# Altium PCB PCB1.PcbDoc
Units mil, origin at the board's own origin, x right, y up, seen from the top; angles counter-clockwise.
Board outline 1058 x 497 mil, 2 copper layers (Top Layer, Bottom Layer); 7 components, 6 nets, 16 pads, 0 vias.
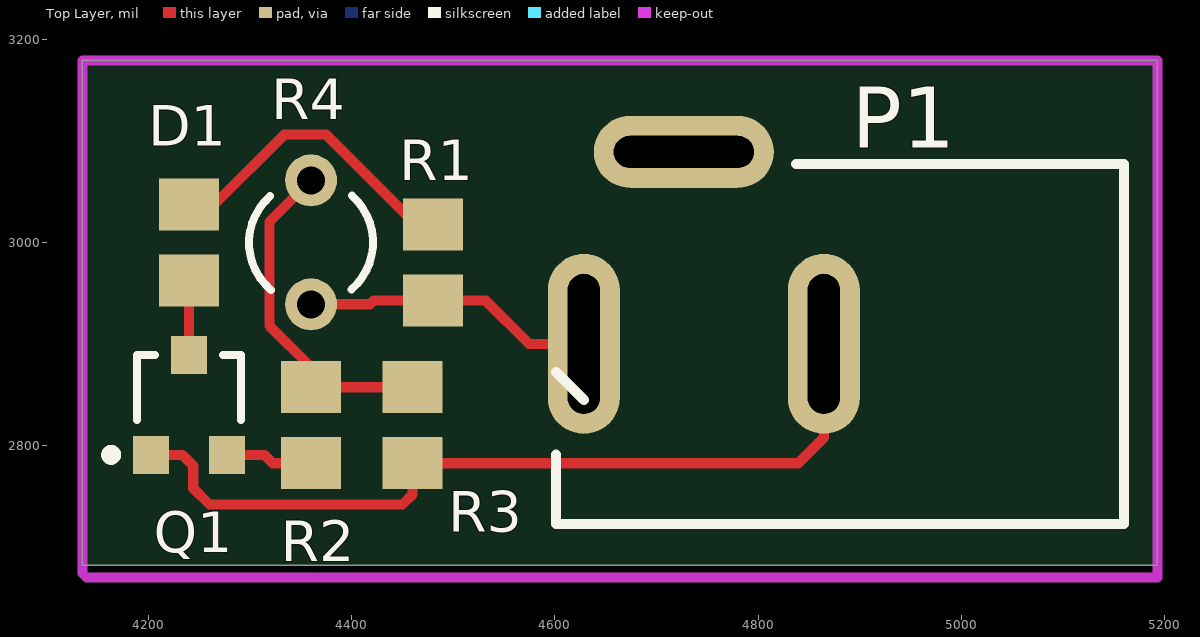
[diagram p0: Top Layer view]
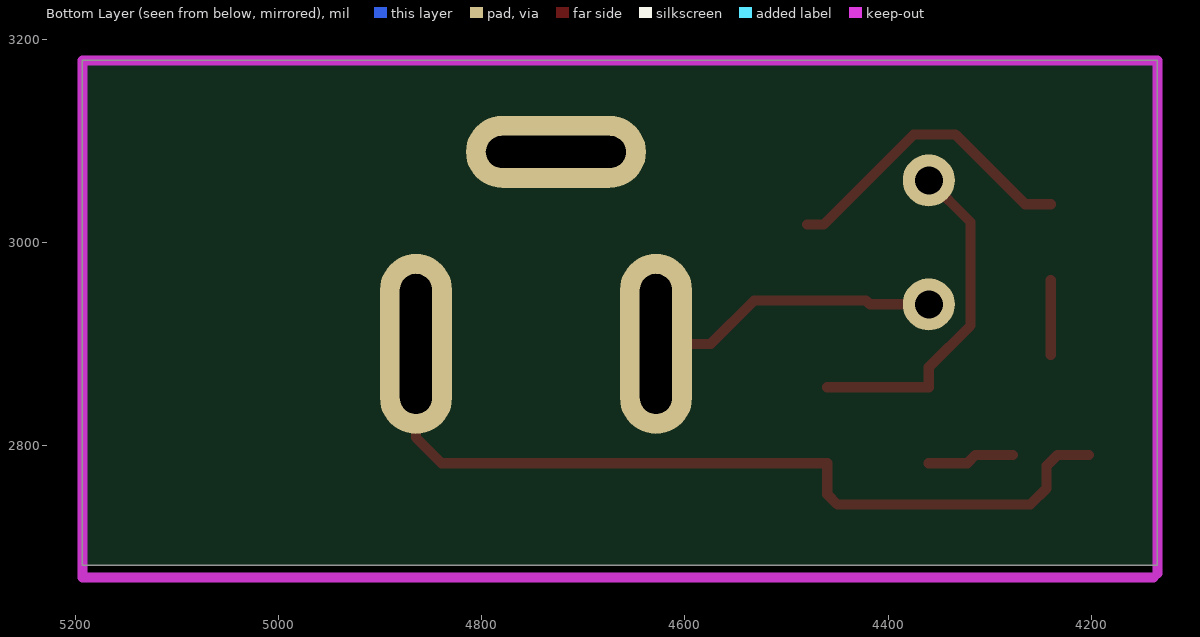
[diagram p1: Bottom Layer view, seen from below]

## Layer stack, top to bottom
Top Layer: signal copper 1.4
Dielectric: dielectric 12.6, FR-4, Dk 4.8
Bottom Layer: signal copper 1.4

## Board outline
4135,3179 5193,3179 5193,2682 4135,2682

## Design rules (kind name [scope] priority, off if disabled: settings)
Clearance [All] p1: gap=10
PolygonConnect [All] p1: connectstyle=Relief reliefconductorwidth=10 reliefentries=4 polygonreliefangle="90 Angle"
RoomDefinition Sheet1 [InComponentClass('Sheet1')] p1: confinementstyle=ConfineIn formatcopy=TRUE lockcomponents=FALSE outline 0,0 2000,0 2000,1000 0,1000
RoutingVias [All] p1: holewidth=28 width=50 viastyle="Through Hole" minholewidth=28 minwidth=50 maxholewidth=28 maxwidth=50
SilkscreenOverComponentPads [All] p1: minsilkscreentomaskgap=10
SolderMaskExpansion [All] p1: expansion=4
TestPointUsage [All] p1: valid=0 allowmultiple=FALSE
Testpoint [All] p1: side=15 testpointundercomponent=TRUE minsize=40 maxsize=100 preferedsize=60 minholesize=0 maxholesize=40 preferedholesize=32 testpointgrid=1 style=1023 order=0-112345678
Width [All] p1: maxlimit=10 minlimit=10 preferedwidth=10
23 further rules are at their usual default settings.

## Components (designator, comment, footprint, x,y, rotation, side; value= is the part's Value field where it differs from the comment)
D1 "LED" 2012[0805] 4240,3000 r270 top
P1 "Header 3" PCBComponent_1 5160,2900 r180 top
Q1 "8550" SOT-23B 4240,2840 r0 top
R1 "Res2" 2012[0805] 4480,2980 r270 top
R2 "Res2" 2012[0805] 4360,2820 r270 top
R3 "Res2" 2012[0805] 4460,2820 r90 top
R4 "5547" R38 4360,3000 r0 top (schematic designator 光敏电阻)

## Footprints (in the part's own frame and the unit in brackets; to place one, negate y for a bottom-side part, rotate by r counter-clockwise, add the part's x,y. Pads: shape width x height; smd on the part's side, far side on the other; paste and mask are expansions set on the pad)
2012[0805] [mm] "Chip Resistor; Body 2.0 x 1.3 mm (LxW typ)"
  rect 1.3x1.5 smd: 1(-0.95,0) 2(0.95,0)
PCBComponent_1 [mm]
  oval 1.8x4.5 hole 0.8 slot 3.5 at 90 deg: 1(13.5,0) 3(7.5,0)
  oval 4.5x1.8 hole 0.8 slot 3.5 at 0 deg: 2(11,-4.8)
  silkscreen extent 0,-4.5 14.2,4.5
R38 [mm] "Crystal, Thru-Hole; 2 Leads; Body 3.1 x 8.2 mm (Dia.xH)"
  round 1.3 hole 0.7: 1(0,1.55) 2(0,-1.55)
  silkscreen extent -1.55,-1.19 1.55,1.17
SOT-23B [mm] "SOT-23; 3 Leads; Body 3.0 x 2.6 mm, inc. leads (LxW max)"
  rect 0.9x0.95 smd: 1(-0.95,-1.25) 2(0.95,-1.25) 3(0,1.25)
  silkscreen extent -2.07,-1.37 1.3,1.25

## Part data
D1: library part LED0, "Typical INFRARED GaAs LED"
P1: "Header, 3-Pin"
Q1: library part PNP, "PNP Bipolar Transistor"
R1 R2 R3: "Resistor"
R4: library part Res2, "Resistor"

## Nets (pads, with @x,y where several pads share a name; then routed paths per layer and width w, separated by ;. In a path a pad name is that pad's centre, name@x,y a point inside that pad or via, vN(x,y) a via of type N, cw(c..) or ccw(c..) an arc to the next point about the centre after c; other vN are vias at no path point)
NetD1_1: D1.1 R1.1 | length 305.1
  Top Layer w10: D1.1 4265,3037.4 4333.6,3106 4375,3106 4463.6,3017.4 R1.1
NetD1_2: D1.2 Q1.3 | length 73.4
  Top Layer w10: Q1.3 D1.2
NetP1_1: P1.1 R1.2 R4.2 | length 287.6
  Top Layer w10: R4.2 4418,2938.98 4421.62,2942.6 R1.2 4532,2942.6 4574.6,2900 P1.1
NetP1_3: P1.3 Q1.1 R3.1 | length 832.6
  Top Layer w10: Q1.1 4233.21,2790.79 4244,2780 4244,2758 4260,2742 4450,2742 4460,2752 R3.1 4839.6,2782.6 4864.72,2807.72 P1.3
NetQ1_2: Q1.2 R2.2 | length 86
  Top Layer w10: Q1.2 4314,2790.79 4322.19,2782.6 R2.2
NetR2_1: R2.1 R3.2 R4.1 | length 337.6
  Top Layer w10: R4.1 4319,3020.02 4319,2918 4360,2877 R2.1 R3.2
pads on no net: P1.2

## Keep-outs
Keep-Out Layer:
  lines w10: 4135,2674 4135,3179 5193,3179 5193,2670 4139,2670